# Altium PCB Copy of Copy of PCB1.PcbDoc
Units mm, origin at the board's own origin, x right, y up, seen from the top; angles counter-clockwise.
Board outline 70.25 x 20.25 mm, 2 copper layers (Top Layer, Bottom Layer); 41 components, 28 nets, 155 pads, 30 vias.
Unrouted connection lines stored in the file: 19.
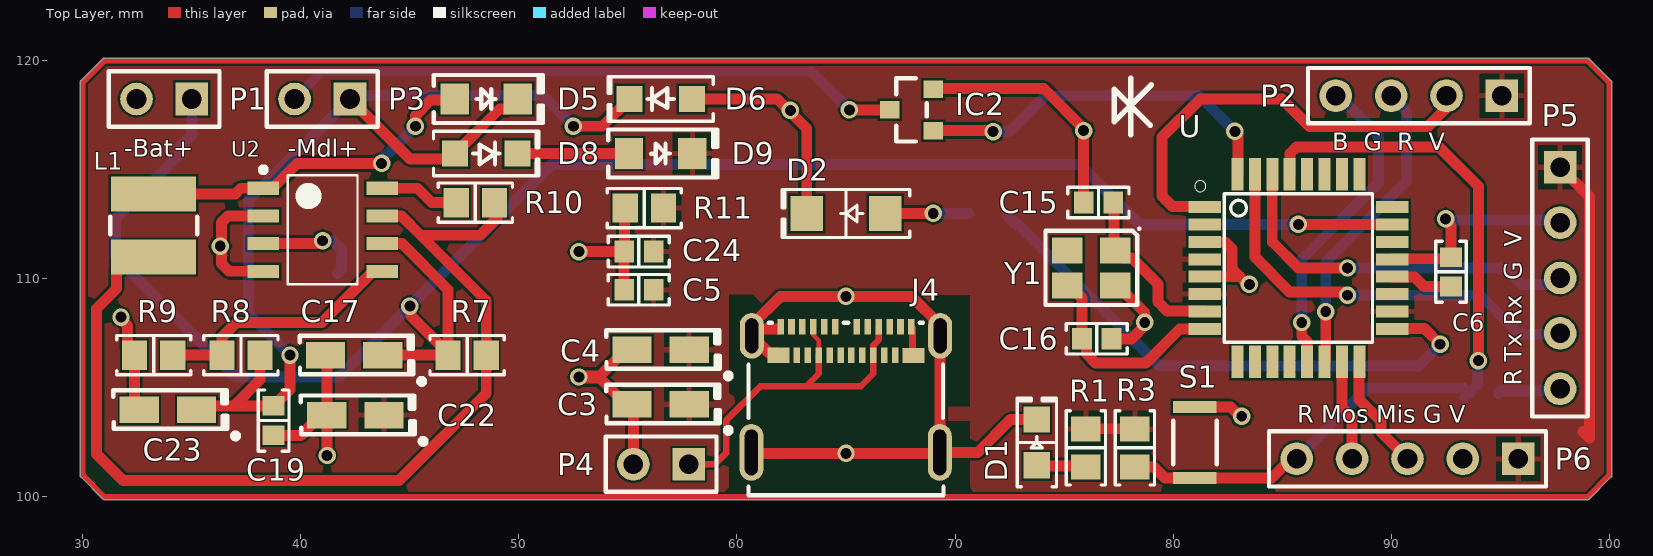
[diagram p0: Top Layer view]
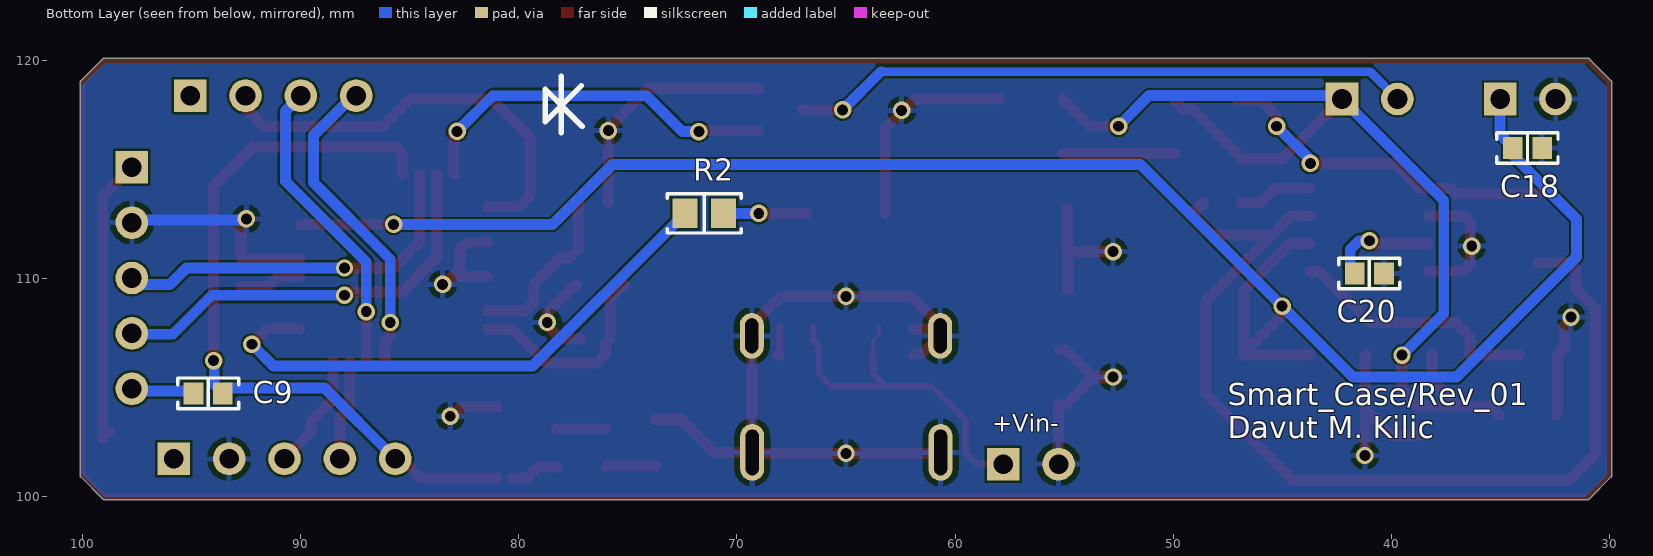
[diagram p1: Bottom Layer view, seen from below]

## Layer stack, top to bottom
Top Solder: solder mask 0.0102, Solder Resist, Dk 3.5
Top Layer: signal copper 0.0356
Dielectric 1: dielectric 0.32, FR-4, Dk 4.8
Bottom Layer: signal copper 0.0356
Bottom Solder: solder mask 0.0102, Solder Resist, Dk 3.5

## Board outline
29.91,100.909 cw(c30,101) 29.873,101 29.873,119 cw(c30,119) 29.91,119.091 29.91,119.09 30.91,120.09 30.909,120.09 cw(c31,120) 31,120.127 99,120.127 cw(c99,120) 99.091,120.09 99.09,120.09 100.09,119.09 100.09,119.091 cw(c100,119) 100.127,119 100.127,101 cw(c100,101) 100.09,100.91 99.09,99.91 99.091,99.91 cw(c99,100) 99,99.873 31,99.873 cw(c31,100) 30.909,99.91 30.91,99.91

## Design rules (kind name [scope] priority, off if disabled: settings)
Clearance [All] p1: gap=0.1 ignorepadtopadclearanceinfootprint=FALSE except(0: Arc-Hole Track-Hole SMDPad-Hole THPad-Hole Via-Hole Fill-Hole Poly-Hole Region-Hole Text-Hole)
MinimumSolderMaskSliver [All] p1: minsoldermaskwidth=0.04
PolygonConnect [All] p1: connectstyle=Relief reliefconductorwidth=0.254 reliefentries=4 polygonreliefangle="90 Angle" airgapwidth=0.254
RoutingVias [All] p1: holewidth=0.711 width=1.27 viastyle="Through Hole" minholewidth=0.4 minwidth=0.8 maxholewidth=0.711 maxwidth=1.27
SilkToSilkClearance [All] p1: silktosilkclearance=0.15
SilkToSolderMaskClearance [IsPad] p1: minsilkscreentomaskgap=0.07 clearancetoexposedcopper=TRUE
SolderMaskExpansion [All] p1: expansion=0.103
Width [All] p1: maxlimit=0.6 minlimit=0.1 preferedwidth=0.5 minimp=50.000000 maximp=50.000000 favimp=50.000000
27 further rules are at their usual default settings.

## Components (designator, comment, footprint, x,y, rotation, side; value= is the part's Value field where it differs from the comment)
C3 "4.7µF" "CAP POL 1206_3216" 56.5,104.25 r180 top
C4 "4.7µF" "CAP POL 1206_3216" 56.5,106.75 r180 top
C5 "0.1µF" "CAP 0603_1608" 55.5,109.5 r0 top
C6 "0.1µF" "CAP 0603_1608" 92.75,110.325 r270 top
C9 "0.1µF" "CAP 0603_1608" 94.25,104.75 r0 bottom
C15 "22pF" "CAP 0603_1608" 76.575,113.5 r180 top
C16 "22pF" "CAP 0603_1608" 76.5,107.25 r0 top
C17 "470µF" "CAP POL 1206_3216" 42.44,106.5 r180 top
C18 "100nF" "CAP 0603_1608" 33.75,116 r0 bottom
C19 "100uF" "CAP 0603_1608" 38.75,103.5 r90 top
C20 "0.1µF" "CAP 0603_1608" 41,110.25 r0 bottom
C22 "100uF" "CAP POL 1206_3216" 42.5,103.75 r180 top
C23 "470µF" "CAP POL 1206_3216" 33.9,104 r180 top
C24 "100nF" "CAP 0603_1608" 55.5,111.25 r0 top
D1 "Red" "LED 0805_2012 RED" 73.75,102.5 r90 top
D2 "White" "LED 1206_3216" 65,113 r180 top
D5 "1N5819" "SMF DO-219AB" 48.5,118.25 r0 top
D6 "1N4007FLTR" SOD123F 56.5,118.25 r180 top
D8 "1N4007FLTR" SOD123F 48.5,115.75 r0 top
D9 "1N5819" "SMF DO-219AB" 56.5,115.75 r0 top
IC2 "DMN2050L-7" "DIODES SOT-23-3" 68,117.75 r180 top
J4 "1054500101" "Molex 1054500101" 65,107.145 r0 top
L1 "100µH" "TDK VLCF4028-2" 33.25,112.45 r270 top
P1 "Header 2" HDR1X2 35,118.25 r180 top
P2 "Header 4" HDR1X4 95.08,118.4 r180 top
P3 "Header 2" HDR1X2 42.25,118.25 r180 top
P4 "Header 2" HDR1X2 57.79,101.5 r180 top
P5 "Header 5" HDR1X5 97.75,115.12 r270 top
P6 "Header 5" HDR1X5 95.83,101.75 r180 top
R1 "1 kOhms" "RES 0805_2012" 76,102.25 r90 top
R2 "1 kOhms" "RES 0805_2012" 71.5,113 r0 bottom
R3 "1 kOhms" "RES 0805_2012" 78.25,102.25 r90 top
R7 "0.27Ohms" "RES 0805_2012" 47.625,106.5 r180 top
R8 "10kOhms" "RES 0805_2012" 37.25,106.5 r0 top
R9 "2.7kOhms" "RES 0805_2012" 33.25,106.5 r0 top
R10 "180 Ohms" "RES 0805_2012" 48,113.5 r0 top
R11 "470Ohms" "RES 0805_2012" 55.75,113.25 r0 top
S1 "EVP-AWED4A" "PANASONIC EVPAW" 81,102.5 r270 top
U "ATMEGA328P-AU" QFP80P900X900X120-32N 85.75,110.5 r0 top
U2 "MC34063A" MC34063A,SOIC127P600X140-8N 41,112.25 r0 top
Y1 "16MHz" "NDK NX3225SA" 76.25,110.5 r180 top

## Footprints (in the part's own frame and the unit in brackets; to place one, negate y for a bottom-side part, rotate by r counter-clockwise, add the part's x,y. Pads: shape width x height; smd on the part's side, far side on the other; paste and mask are expansions set on the pad)
"CAP 0603_1608" [mm] "Chip Capacitor, 2-Leads, Body 1.60x0.80mm, IPC Medium Density"
  rect 0.9x1 smd: 1(-0.675,0) 2(0.675,0)
  silkscreen extent -1.4,-0.7 1.4,0.7, body extent -0.8,-0.41 0.8,0.41, height 0.82
"CAP POL 1206_3216" [mm] "Molded Capacitor, 2-Leads, Body 3.20x1.6mm, IPC Medium Density"
  rect 1.8x1.23 smd: 1(-1.31,0) 2(1.31,0)
  silkscreen extent -3.22,-0.9 2.5,1.32, body extent -1.72,-0.85 1.71,0.85, height 1.7
"DIODES SOT-23-3" [mm] "SOT23, 3-Leads, Body 2.90x2.40mm, Pitch 0.95mm, IPC Medium Density"
  rect 0.9x0.8 smd: 1(-1,0.95) 2(-1,-0.95) 3(1,0)
  silkscreen extent -0.7,-1.45 0.7,1.45, body extent -1.41,-1.45 1.41,1.45, height 1.5
HDR1X2 [mm] "Connector; Header; 2 Position"
  rect 1.5x1.5 hole 0.9: 1(0,0)
  round 1.5 hole 0.9: 2(2.54,0)
  silkscreen extent -1.27,-1.27 3.81,1.27
HDR1X4 [mm] "Connector; Header; 4 Position"
  rect 1.5x1.5 hole 0.9: 1(0,0)
  round 1.5 hole 0.9: 2(2.54,0) 3(5.08,0) 4(7.62,0)
  silkscreen extent -1.27,-1.27 8.89,1.27
HDR1X5 [mm] "Connector; Header; 5 Position"
  rect 1.5x1.5 hole 0.9: 1(0,0)
  round 1.5 hole 0.9: 2(2.54,0) 3(5.08,0) 4(7.62,0) 5(10.16,0)
  silkscreen extent -1.27,-1.27 11.43,1.27
"LED 0805_2012 RED" [mm] "Chip Diode, 2-Leads, Body 2.00x1.25mm, IPC Medium Density"
  rect 1.2x1.2 smd: 1(-1.05,0) 2(1.05,0)
  silkscreen extent -2.03,-0.9 2.03,0.9, body extent -1,-0.62 1,0.63, height 0.9
"LED 1206_3216" [mm] "Chip Diode, 2-Leads, Body 3.13x1.55mm, IPC Medium Density"
  rect 1.5x1.6 smd: 1(-1.8,0) 2(1.8,0)
  silkscreen extent -2.92,-1.1 2.92,1.1, body extent -1.6,-0.8 1.6,0.8, height 0.9
MC34063A,SOIC127P600X140-8N [mm] "1.5 A, Step-Up/Down/  Inverting Switching  RegulatorsSOIC, 8-Leads, Body 4,90x3,90mm, Pitch 1,27mm, IPC Medium Density"
  rect 1.45x0.6 smd: 1(-2.725,1.905) 2(-2.725,0.635) 3(-2.725,-0.635) 4(-2.725,-1.905) 5(2.725,-1.905) 6(2.725,-0.635) 7(2.725,0.635) 8(2.725,1.905)
  silkscreen extent -2.85,-2.5 1.6,2.88, body extent -3,-2.5 3,2.5, height 1.4
"Molex 1054500101" [mm] "USB-C Receptacle Connector 24 Position Surface Mount, 24 Position, Body 8.94x7.90mm"
  rect 0.3x0.7 smd: A1(-3,0.655) A2(-2.5,0.655) A3(-2,0.655) A4(-1.5,0.655) A5(-1,0.655) A6(-0.5,0.655) A7(0.5,0.655) A8(1,0.655) A9(1.5,0.655) A10(2,0.655) A11(2.5,0.655) A12(3,0.655) B2(2.25,-0.645) B3(1.75,-0.645) B4(1.25,-0.645) B5(0.75,-0.645) B6(0.25,-0.645) B7(-0.25,-0.645) B8(-0.75,-0.645) B9(-1.25,-0.645) B10(-1.75,-0.645) B11(-2.25,-0.645)
  rect 1x0.7 smd: B1(3.1,-0.655) B12(-3.1,-0.645)
  oval 1.1x2.6 hole 2.1 slot 0.6 at 0 deg unplated: S(-4.34,-5.105) S(4.3,-5.105)
  oval 1.1x2.1 hole 1.6 slot 0.6 at 0 deg unplated: S(-4.32,0.245) S(4.32,0.245)
  silkscreen extent -4.47,-7.07 4.47,0.83, body extent -4.47,-7.07 4.47,0.83, height 3.21
"NDK NX3225SA" [mm] "Crystal, 4-Leads, Body 2.50x3.20mm, Pitch 2.20mm, IPC Medium Density"
  rect 1.4x1.2 smd: 1(-1.1,-0.8) 2(1.1,-0.8) 3(1.1,0.8) 4(-1.1,0.8)
  silkscreen extent -2.25,-1.85 2.1,1.7, body extent -1.61,-1.26 1.61,1.26, height 0.6
"PANASONIC EVPAW" [mm]
  rect 0.55x2 smd: 1(-1.625,0) 2(1.625,0)
  silkscreen extent -1,-1 1,1, body extent -1.75,-1 1.75,1, height 0.58
QFP80P900X900X120-32N [mm]
  rect 1.5x0.55 smd: 1(-4.3,2.8) 2(-4.3,2) 3(-4.3,1.2) 4(-4.3,0.4) 5(-4.3,-0.4) 6(-4.3,-1.2) 7(-4.3,-2) 8(-4.3,-2.8) 17(4.3,-2.8) 18(4.3,-2) 19(4.3,-1.2) 20(4.3,-0.4) 21(4.3,0.4) 22(4.3,1.2) 23(4.3,2) 24(4.3,2.8)
  rect 0.55x1.5 smd: 9(-2.8,-4.3) 10(-2,-4.3) 11(-1.2,-4.3) 12(-0.4,-4.3) 13(0.4,-4.3) 14(1.2,-4.3) 15(2,-4.3) 16(2.8,-4.3) 25(2.8,4.3) 26(2,4.3) 27(1.2,4.3) 28(0.4,4.3) 29(-0.4,4.3) 30(-1.2,4.3) 31(-2,4.3) 32(-2.8,4.3)
  silkscreen extent -4.75,-3.4 3.4,4
"RES 0805_2012" [mm] "Chip Resistor, 2-Leads, Body 2.00x1.25mm, IPC Medium Density"
  rect 1.15x1.35 smd: 1(-0.875,0) 2(0.875,0)
  silkscreen extent -1.7,-0.9 1.7,0.9, body extent -1,-0.62 1,0.63, height 0.6
"SMF DO-219AB" [mm] "Molded Diode, 2-Leads, Body 3.90x1.90mm, IPC Medium Density"
  rect 1.3x1.4 smd: 1(-1.45,0) 2(1.45,0)
  silkscreen extent -2.4,-1.1 2.59,1.1, body extent -1.5,-0.9 1.5,0.9, height 1.18
SOD123F [mm] "SODFL, 2-Leads, Body 1.60x3.50mm, IPC Medium Density"
  rect 1.2x1.2 smd: 1(-1.43,0) 2(1.43,0)
  silkscreen extent -2.41,-1.02 2.41,1.02, body extent -1.75,-0.8 1.75,0.8, height 1.1
"TDK VLCF4028-2" [mm] "Precision Wire Wound Inductor, 2-Leads, Body 4.00x4.00mm, IPC Medium Density"
  rect 1.6x3.9 smd: 1(-1.45,0) 2(1.45,0)
  silkscreen extent -0.4,-2 0.4,2, body extent -2.05,-2 2.05,2, height 2.81

## Part data
C3 C4: library part T55A475M010C0500, "CAP TANT POLY 4.7UF 10V 1206", Device Package="1206 (3216 Metric)", ESR (Equivalent Series Resistance)="500mOhm @ 100kHz", Manufacturer="Vishay Sprague", Manufacturer Size Code=A, Operating Temperature="-55°C ~ 105°C", Supplier Part Number 1=718-2008-1-ND, Tolerance=±20%, Voltage - Rated=10V, Capacitance=4.7µF, ComponentLink1Description=Datasheet, ComponentLink1URL=http://www.vishay.com/docs/40174/t55.pdf, ComponentLink2Description="DigiKey Link", ComponentLink2URL=http://digikey.com/product-detail/en/vishay-sprague/T55A475M010C0500/718-2008-1-ND/4989604, Features="General Purpose", Height - Seated (Max)="0.071\" (1.80mm)", LastUpdated="2.09.2020 01:16:25", Lifecycle Status=Active, Minimum Order=1, Mounting Type="Surface Mount", Package / Case="1206 (3216 Metric)", Packaging=TapeAndReel, PartId=67, Part Number=T55A475M010C0500, Part Status=Active, Price=0.32, Series="vPolyTan™ T55", Size / Dimension="0.126\" L x 0.063\" W (3.20mm x 1.60mm)", Supplier 1=DigiKey, Type=Molded
C5 C9 C20: library part C0603C104K5RAC7411, "CAP CER 0.1UF 50V X7R 0603", Device Package="0603 (1608 Metric)", Manufacturer=KEMET, Operating Temperature="-55°C ~ 125°C", Supplier Part Number 1=399-7374-2-ND, Temperature Coefficient=X7R, Tolerance=±10%, Voltage - Rated=50V, Applications="Bypass, Decoupling", Capacitance=0.1µF, ComponentLink1Description=Datasheet, ComponentLink1URL=https://api.kemet.com/component-edge/download/datasheet/C0603C104K5RAC7411.pdf, ComponentLink2Description="DigiKey Link", ComponentLink2URL=http://digikey.com/product-detail/en/kemet/C0603C104K5RAC7411/399-7374-2-ND/3317013, LastUpdated="2.09.2020 01:03:36", Lifecycle Status=Active, Minimum Order=15000, Mounting Type="Surface Mount, MLCC", Package / Case="0603 (1608 Metric)", Packaging=TapeAndReel, PartId=2233, Part Number=C0603C104K5RAC7411, Part Status=Active, Price=0.02, Series="SMD Comm X7R", Size / Dimension="0.063\" L x 0.031\" W (1.60mm x 0.80mm)", Supplier 1=DigiKey, Thickness (Max)="0.035\" (0.90mm)"
C6: library part CS0603KRX7R7BB104, "CAP CER 0.1UF 16V X7R 0603", Device Package="0603 (1608 Metric)", Manufacturer=Yageo, Operating Temperature="-55°C ~ 125°C", Supplier Part Number 1=311-3560-1-ND, Temperature Coefficient=X7R, Tolerance=±10%, Voltage - Rated=16V, Applications="Boardflex Sensitive", Capacitance=0.1µF, ComponentLink1Description=Datasheet, ComponentLink1URL=http://www.yageo.com/NewPortal/yageodocoutput?fileName=/pdf/MLCC/UPY-ST_NPOX7R_16V-to-3KV_5.pdf, ComponentLink2Description="DigiKey Link", ComponentLink2URL=http://digikey.com/product-detail/en/yageo/CS0603KRX7R7BB104/311-3560-1-ND/7648487, Features="Soft Termination", LastUpdated="2.09.2020 01:03:36", Lifecycle Status=Active, Minimum Order=1, Mounting Type="Surface Mount, MLCC", Package / Case="0603 (1608 Metric)", Packaging=TapeAndReel, PartId=2286, Part Number=CS0603KRX7R7BB104, Part Status=Active, Price=0.02, Series=CS, Size / Dimension="0.063\" L x 0.031\" W (1.60mm x 0.80mm)", Supplier 1=DigiKey, Thickness (Max)="0.037\" (0.95mm)"
C15 C16 C18 C19 C24: library part C0603C104K5RAC7411, "CAP CER 0.1UF 50V X7R 0603", Capacitance=0.1µF, Device Package="0603 (1608 Metric)", Manufacturer=KEMET, Operating Temperature="-55°C ~ 125°C", Supplier Part Number 1=399-7374-2-ND, Temperature Coefficient=X7R, Tolerance=±10%, Voltage - Rated=50V, Applications="Bypass, Decoupling", ComponentLink1Description=Datasheet, ComponentLink1URL=https://api.kemet.com/component-edge/download/datasheet/C0603C104K5RAC7411.pdf, ComponentLink2Description="DigiKey Link", ComponentLink2URL=http://digikey.com/product-detail/en/kemet/C0603C104K5RAC7411/399-7374-2-ND/3317013, LastUpdated="2.09.2020 01:03:36", Lifecycle Status=Active, Minimum Order=15000, Mounting Type="Surface Mount, MLCC", Package / Case="0603 (1608 Metric)", Packaging=TapeAndReel, PartId=2233, Part Number=C0603C104K5RAC7411, Part Status=Active, Price=0.02, Series="SMD Comm X7R", Size / Dimension="0.063\" L x 0.031\" W (1.60mm x 0.80mm)", Supplier 1=DigiKey, Thickness (Max)="0.035\" (0.90mm)"
C17 C22 C23: library part T55A475M010C0500, "CAP TANT POLY 4.7UF 10V 1206", Capacitance=4.7µF, Device Package="1206 (3216 Metric)", ESR (Equivalent Series Resistance)="500mOhm @ 100kHz", Manufacturer="Vishay Sprague", Manufacturer Size Code=A, Operating Temperature="-55°C ~ 105°C", Supplier Part Number 1=718-2008-1-ND, Tolerance=±20%, Voltage - Rated=10V, ComponentLink1Description=Datasheet, ComponentLink1URL=http://www.vishay.com/docs/40174/t55.pdf, ComponentLink2Description="DigiKey Link", ComponentLink2URL=http://digikey.com/product-detail/en/vishay-sprague/T55A475M010C0500/718-2008-1-ND/4989604, Features="General Purpose", Height - Seated (Max)="0.071\" (1.80mm)", LastUpdated="2.09.2020 01:16:25", Lifecycle Status=Active, Minimum Order=1, Mounting Type="Surface Mount", Package / Case="1206 (3216 Metric)", Packaging=TapeAndReel, PartId=67, Part Number=T55A475M010C0500, Part Status=Active, Price=0.32, Series="vPolyTan™ T55", Size / Dimension="0.126\" L x 0.063\" W (3.20mm x 1.60mm)", Supplier 1=DigiKey, Type=Molded
D1: library part EAST2012RA1, "LED RED CLEAR 2SMD", Current - Test=20mA, Device Package="0805 (2012 Metric)", Lens Color=Colorless, Manufacturer="Everlight Electronics Co Ltd", Millicandela Rating=79mcd, Supplier Device Package=2-SMD, Supplier Part Number 1=1080-EAST2012RA1CT-ND, Voltage - Forward (Vf) (Typ)=2V, Color=Red, ComponentLink1Description=Datasheet, ComponentLink1URL=https://everlightamericas.com/index.php?controller=attachment&id_attachment=2888, ComponentLink2Description="DigiKey Link", ComponentLink2URL=http://digikey.com/product-detail/en/everlight-electronics-co-ltd/EAST2012RA1/1080-EAST2012RA1CT-ND/11201058, Configuration=Standard, Height (Max)=1.00mm, LastUpdated="2.09.2020 01:21:00", Lens Size="1.40mm x 1.25mm", Lens Style="Rectangle with Flat Top", Lens Transparency=Clear, Lifecycle Status=Active, Minimum Order=1, Mounting Type="Surface Mount", Package / Case="0805 (2012 Metric)", Packaging=TapeAndReel, PartId=943, Part Number=EAST2012RA1, Part Status=Active, Price=0.03, Series=-, Size / Dimension="2.00mm L x 1.25mm W", Supplier 1=DigiKey, Viewing Angle=120°, Wavelength - Dominant=626nm, Wavelength - Peak=632nm
D2: library part LTW-C230DS, "LED WHITE 1206 SMD", Current - Test=20mA, Device Package="1206 (3216 Metric)", Lens Color=Yellow, Manufacturer="Lite-On Inc.", Millicandela Rating=315mcd, Supplier Device Package=1206, Supplier Part Number 1=160-2221-1-ND, Voltage - Forward (Vf) (Typ)=3.2V, Color=White, ComponentLink1Description=Datasheet, ComponentLink1URL=http://optoelectronics.liteon.com/upload/download/DS22-2007-0232/LTW-C230DS.pdf, ComponentLink2Description="DigiKey Link", ComponentLink2URL=http://digikey.com/product-detail/en/lite-on-inc/LTW-C230DS/160-2221-1-ND/7597462, Configuration=Independent, Height (Max)=1.10mm, LastUpdated="2.09.2020 01:22:59", Lens Size="1.50mm x 1.60mm", Lens Style="Rectangle with Flat Top", Lifecycle Status=Active, Minimum Order=1, Mounting Type="Surface Mount", Package / Case="1206 (3216 Metric)", Packaging=TapeAndReel, PartId=933, Part Number=LTW-C230DS, Part Status=Active, Price=0.13, Series=-, Size / Dimension="3.20mm L x 1.60mm W", Supplier 1=DigiKey, Viewing Angle=130°
D5 D9: library part SMF45A-E3-08, "TVS DIODE 45V 72.7V DO219AB", Capacitance @ Frequency="162pF @ 1MHz", Current - Peak Pulse (10/1000µs)=2.8A, Manufacturer="Vishay Semiconductor Diodes Division", Operating Temperature="-65°C ~ 175°C (TJ)", Package / Case=DO-219AB, Power - Peak Pulse=200W, Power Line Protection=No, Supplier Device Package=SMF, Supplier Part Number 1=SMF45A-E3-08GICT-ND, Voltage - Breakdown (Min)=50V, Voltage - Clamping (Max) @ Ipp=72.7V, Voltage - Reverse Standoff (Typ)=45V, Applications="General Purpose", ComponentLink1Description=Datasheet, ComponentLink1URL=http://www.vishay.com/docs/85881/smf5v0atosmf58a.pdf, ComponentLink2Description="DigiKey Link", ComponentLink2URL=http://digikey.com/product-detail/en/vishay-semiconductor-diodes-division/SMF45A-E3-08/SMF45A-E3-08GICT-ND/5639183, LastUpdated="2.09.2020 01:27:45", Lifecycle Status=Active, Minimum Order=1, Mounting Type="Surface Mount", Packaging=TapeAndReel, PartId=5508, Part Number=SMF45A-E3-08, Part Status=Active, Price=0.10, Series=-, Supplier 1=DigiKey, Type=Zener, Unidirectional Channels=1
D6 D8: "STANDARD RECTIFIER 1000V SOD-123", Capacitance @ Vr, F="15pF @ 4V, 1MHz", Current - Average Rectified (Io)=1A, Current - Reverse Leakage @ Vr="5µA @ 1000V", Manufacturer="SMC Diode Solutions", Package / Case=SOD-123F, Supplier Device Package=SOD-123FL, Supplier Part Number 1=1655-1N4007FLCT-ND, Voltage - DC Reverse (Vr) (Max)=1000V, Voltage - Forward (Vf) (Max) @ If="1.1V @ 1A", ComponentLink1Description=Datasheet, ComponentLink1URL=http://www.smc-diodes.com/propdf/1N4001FL-1N4007FL%20N1646%20REV.A.pdf, ComponentLink2Description="DigiKey Link", ComponentLink2URL=http://digikey.com/product-detail/en/smc-diode-solutions/1N4007FLTR/1655-1N4007FLCT-ND/11657827, Diode Type=Standard, LastUpdated="30.08.2020 20:59:55", Lifecycle Status=Active, Minimum Order=1, Mounting Type="Surface Mount", Packaging=TapeAndReel, PartId=3314, Part Number=1N4007FLTR, Price=0.01, Speed="Standard Recovery >500ns, > 200mA (Io)", Supplier 1=DigiKey
IC2: "MOSFET N-CH 20V 5.9A SOT23-3", Current - Continuous Drain (Id) @ 25°C="5.9A (Ta)", Drain to Source Voltage (Vdss)=20V, Drive Voltage (Max Rds On,  Min Rds On)="2V, 4.5V", Input Capacitance (Ciss) (Max) @ Vds="532pF @ 10V", Manufacturer="Diodes Incorporated", Operating Temperature="-55°C ~ 150°C (TJ)", Package / Case="TO-236-3, SC-59, SOT-23-3", Power Dissipation (Max)="1.4W (Ta)", Supplier Device Package=SOT-23-3, Supplier Part Number 1=DMN2050LDICT-ND, ComponentLink1Description=Datasheet, ComponentLink1URL=https://www.diodes.com/assets/Datasheets/ds31502.pdf, ComponentLink2Description="DigiKey Link", ComponentLink2URL=http://digikey.com/product-detail/en/diodes-incorporated/DMN2050L-7/DMN2050LDICT-ND/1964751, FET Type=N-Channel, Gate Charge (Qg) (Max) @ Vgs="6.7nC @ 4.5V", LastUpdated="2.09.2020 01:25:02", Lifecycle Status=Active, Minimum Order=1, Mounting Type="Surface Mount", Packaging=TapeAndReel, Part Number=DMN2050L-7, Part Status=Active, Price=0.12, Rds On (Max) @ Id, Vgs="29mOhm @ 5A, 4.5V", Series=-, Supplier 1=DigiKey, Technology="MOSFET (Metal Oxide)", Vgs (Max)=±12V, Vgs(th) (Max) @ Id="1.4V @ 250µA"
J4: "CONN RCP USB3.1 TYPEC 24P SMD RA", Current Rating (Amps)="0.25A, 1A, 5A", Manufacturer=Molex, Operating Temperature="-30°C ~ 85°C", Supplier Part Number 1=WM12856CT-ND, Voltage - Rated=30VAC/DC, ComponentLink1Description=Datasheet, ComponentLink1URL=https://www.molex.com/pdm_docs/ps/PS-105448-001.pdf, ComponentLink2Description="DigiKey Link", ComponentLink2URL=http://digikey.com/product-detail/en/molex/1054500101/WM12856CT-ND/5843891, Connector Type="USB - C (Type - C)", Gender=Receptacle, LastUpdated="6.06.2020 02:14:04", Lifecycle Status=Active, Mating Cycles=10000, Minimum Order=1, Mounting Feature=Horizontal, Mounting Type="Surface Mount, Right Angle; Through Hole", Number of Contacts=24, Number of Ports=1, Packaging=TapeAndReel, Part Number=1054500101, Part Status=Active, Price=1.22, Series=105445, Shielding=Shielded, Specifications="USB 3.1 (USB 3.1 Gen 2, Superspeed+)", Supplier 1=DigiKey, Termination=Solder
L1: library part VLCF5028T-101MR33-2, "FIXED IND 100UH 330MA 670 MOHM", Current - Saturation=330mA, DC Resistance (DCR)="670mOhm Max", Device Package=Nonstandard, Inductance Frequency - Test=100kHz, Manufacturer="TDK Corporation", Operating Temperature="-40°C ~ 105°C", Supplier Part Number 1=445-6555-1-ND, Tolerance=±20%, ComponentLink1Description=Datasheet, ComponentLink1URL=https://product.tdk.com/info/en/catalog/datasheets/inductor_commercial_power_vlcf5028-2_en.pdf?ref_disty=digikey, ComponentLink2Description="DigiKey Link", ComponentLink2URL=http://digikey.com/product-detail/en/tdk-corporation/VLCF5028T-101MR33-2/445-6555-1-ND/2465861, Current Rating (Amps)=330mA, Height - Seated (Max)="0.110\" (2.80mm)", Inductance=100µH, LastUpdated="2.09.2020 01:22:16", Lifecycle Status=Active, Material - Core=Ferrite, Minimum Order=1, Mounting Type="Surface Mount", Package / Case=Nonstandard, Packaging=TapeAndReel, PartId=186, Part Number=VLCF5028T-101MR33-2, Part Status=Active, Price=0.63, Series=VLCF, Shielding=Shielded, Size / Dimension="0.197\" L x 0.197\" W (5.00mm x 5.00mm)", Supplier 1=DigiKey, Type=Wirewound
P1 P3 P4: "Header, 2-Pin", LatestRevisionDate=17-Jul-2002, LatestRevisionNote="Re-released for DXP Platform.", Publisher="Altium Limited"
P2: "Header, 4-Pin", LatestRevisionDate=17-Jul-2002, LatestRevisionNote="Re-released for DXP Platform.", Publisher="Altium Limited"
P5 P6: "Header, 5-Pin", LatestRevisionDate=17-Jul-2002, LatestRevisionNote="Re-released for DXP Platform.", Publisher="Altium Limited"
R1 R2 R3: library part RNCP0805FTD1K00, "RES 1K OHM 1% 1/4W 0805", Device Package="0805 (2012 Metric)", Manufacturer="Stackpole Electronics Inc", Operating Temperature="-55°C ~ 155°C", Power (Watts)="0.25W, 1/4W", Supplier Device Package=0805, Supplier Part Number 1=RNCP0805FTD1K00CT-ND, Temperature Coefficient=±100ppm/°C, Tolerance=±1%, ComponentLink1Description=Datasheet, ComponentLink1URL=https://www.seielect.com/catalog/sei-rncp.pdf, ComponentLink2Description="DigiKey Link", ComponentLink2URL=http://digikey.com/product-detail/en/stackpole-electronics-inc/RNCP0805FTD1K00/RNCP0805FTD1K00CT-ND/2240568, Composition="Thin Film", Features="Anti-Sulfur, Moisture Resistant", Height - Seated (Max)="0.024\" (0.60mm)", LastUpdated="2.09.2020 01:15:23", Lifecycle Status=Active, Minimum Order=1, Number of Terminations=2, Package / Case="0805 (2012 Metric)", Packaging=TapeAndReel, PartId=28023, Part Number=RNCP0805FTD1K00, Part Status=Active, Price=0.01, Resistance="1 kOhms", Series=RNCP, Size / Dimension="0.079\" L x 0.049\" W (2.00mm x 1.25mm)", Supplier 1=DigiKey
R7 R8 R9 R10 R11: library part RNCP0805FTD1K00, "RES 1K OHM 1% 1/4W 0805", Device Package="0805 (2012 Metric)", Manufacturer="Stackpole Electronics Inc", Operating Temperature="-55°C ~ 155°C", Power (Watts)="0.25W, 1/4W", Resistance="1 kOhms", Supplier Device Package=0805, Supplier Part Number 1=RNCP0805FTD1K00CT-ND, Temperature Coefficient=±100ppm/°C, Tolerance=±1%, ComponentLink1Description=Datasheet, ComponentLink1URL=https://www.seielect.com/catalog/sei-rncp.pdf, ComponentLink2Description="DigiKey Link", ComponentLink2URL=http://digikey.com/product-detail/en/stackpole-electronics-inc/RNCP0805FTD1K00/RNCP0805FTD1K00CT-ND/2240568, Composition="Thin Film", Features="Anti-Sulfur, Moisture Resistant", Height - Seated (Max)="0.024\" (0.60mm)", LastUpdated="2.09.2020 01:15:23", Lifecycle Status=Active, Minimum Order=1, Number of Terminations=2, Package / Case="0805 (2012 Metric)", Packaging=TapeAndReel, PartId=28023, Part Number=RNCP0805FTD1K00, Part Status=Active, Price=0.01, Series=RNCP, Size / Dimension="0.079\" L x 0.049\" W (2.00mm x 1.25mm)", Supplier 1=DigiKey
S1: "3.0MM X 2.0MM / 3.3N / 0.15MM ST", Contact Rating @ Voltage="0.02A @ 15VDC", Manufacturer="Panasonic Electronic Components", Operating Force=330gf, Operating Temperature="-40°C ~ 85°C", Supplier Part Number 1=P123440CT-ND, Actuator Height off PCB, Vertical=0.60mm, Actuator Orientation="Top Actuated", Actuator Type=Standard, Circuit=SPST-NO, ComponentLink1Description=Datasheet, ComponentLink1URL=https://industrial.panasonic.com/ac/cdn/e/control/switch/light-touch/catalog/sw_lt_eng_3020s.pdf, ComponentLink2Description="DigiKey Link", ComponentLink2URL=http://digikey.com/product-detail/en/panasonic-electronic-components/EVP-AWED4A/P123440CT-ND/8568287, Illumination=Non-Illuminated, Ingress Protection="IP67 - Dust Tight, Waterproof", LastUpdated="2.09.2020 01:27:07", Lifecycle Status=Active, Minimum Order=1, Mounting Type="Surface Mount", Outline="3.00mm x 2.00mm", Packaging=TapeAndReel, Part Number=EVP-AWED4A, Part Status=Active, Price=0.14, Series=EVPAW, Supplier 1=DigiKey, Switch Function=Off-Mom, Termination Style="SMD (SMT) Tab"
U: "AVR AVR® ATmega Microcontroller IC 8-Bit 20MHz 32KB _16K x 16_ FLASH 32-TQFP _7x7_", Package="TQFP-32 Microchip", Availability=Unavailable, MF=Microchip, MP=ATMEGA328P-AU, Price=None, SnapEDA_Link=https://www.snapeda.com/parts/ATMEGA328P-AU/Microchip/view-part/44280/?ref=snap
U2: "1.5 A, Step-Up/Down/ / Inverting Switching / Regulators"
Y1: library part NX3225SA-16.000M-STD-CRS-2, "CRYSTAL 16.0000MHZ 8PF SMD", ESR (Equivalent Series Resistance)="120 Ohms", Frequency Stability=±50ppm, Frequency Tolerance=±15ppm, Load Capacitance=8pF, Manufacturer="NDK America, Inc.", Operating Mode=Fundamental, Operating Temperature="-40°C ~ 125°C", Package / Case="4-SMD, No Lead", Ratings=AEC-Q200, Supplier Part Number 1=644-1129-1-ND, ComponentLink1Description=Datasheet, ComponentLink1URL=http://www.ndk.com/images/products/catalog/c_NX3225SA-STD-CRS-2_e.pdf, ComponentLink2Description="DigiKey Link", ComponentLink2URL=http://digikey.com/product-detail/en/ndk-america-inc/NX3225SA-16.000M-STD-CRS-2/644-1129-1-ND/1788484, Frequency=16MHz, Height - Seated (Max)="0.024\" (0.60mm)", LastUpdated="2.09.2020 01:21:59", Lifecycle Status=Active, Minimum Order=1, Mounting Type="Surface Mount", Packaging=TapeAndReel, PartId=598, Part Number=NX3225SA-16.000M-STD-CRS-2, Part Status=Active, Price=0.54, Series=NX3225SA, Size / Dimension="0.126\" L x 0.098\" W (3.20mm x 2.50mm)", Supplier 1=DigiKey, Type="MHz Crystal"

## Via types
v1: diameter 0.8, hole 0.5, Top Layer to Bottom Layer, 30 vias

## Nets (pads, with @x,y where several pads share a name; then routed paths per layer and width w, separated by ;. In a path a pad name is that pad's centre, name@x,y a point inside that pad or via, vN(x,y) a via of type N, cw(c..) or ccw(c..) an arc to the next point about the centre after c; other vN are vias at no path point)
Bat+: C17.1 C18.2 P1.1 R7.2 U2.6 U.23 | length 87.5
  Top Layer w0.5: U2.6 44.635,111.615 46.75,109.5 R7.2@46.75,106.6 ; C17.1 R7.2 R7.2@46.75,106.6 ; v1(45,108.75) 45.057,108.693 45.057,108.293 R7.2@46.75,106.6 ; v1(85.75,112.5) U.23
  Bottom Layer w0.5: P1.1 35,116.625 34.425,116.05 C18.2 34.425,115.675 31.5,112.75 31.5,111 37,105.5 41.75,105.5 v1(45,108.75) 51.5,115.25 75.709,115.25 78.459,112.5 v1(85.75,112.5)
Bat_sw: IC2.1 U.32 | length 17.2
  Top Layer w0.5: IC2.1 71.7,116.8 v1(71.75,116.75) ; v1(82.836,116.765) 82.971,116.629 82.971,114.821 U.32
  Bottom Layer w0.5: v1(71.75,116.75) 72.5,116.75 74.15,118.4 81.2,118.4 v1(82.836,116.765)
DTR: C9.2 P5.5 | length 3.2
  Bottom Layer w0.5: C9.2 95.03,104.855 97.645,104.855 P5.5 P5.5@97.559,105.151
GND: C3.2 C4.2 C5.1 C6.1 C15.2 C16.2 C17.2 C18.1 C19.1 C20.1 C22.2 C23.2 C24.1 D1.2 D2.2 D6.1 IC2.2 J4.A1 J4.A12 J4.B1 J4.B12 J4.S P1.2 P4.2 P5.2 P6.2 R9.1 R11.1 S1.1 U2.2 U2.4 U.3 U.5 U.21 Y1.4 | length 110.1
  Top Layer w0.2: J4.A1@61.9,107.7 J4.A1
  Top Layer w0.3: J4.A12 68.05,107.75 J4.B1@68.05,106.54
  Top Layer w0.5: v1(31.75,108.25) 31.75,108.169 32.05,107.869 32.05,106.825 R9.1 32.375,103.815 C23.2@32.44,103.75 ; U2.4 38.27,110.35 36.7,110.35 36.357,110.693 36.357,111.443 v1(36.3,111.5) 36.357,111.557 36.357,112.582 36.66,112.885 U2.2 ; C19.1 40,102.825 40.54,103.365 40.54,103.385 40.905,103.75 C22.2 ; C17.2 41.19,106.44 C22.2 ; v1(41.2,101.9) 41.2,103.74 C22.2 ; v1(52.75,111.25) C24.1 ; C5.1 C24.1 ; R11.1 54.85,113.225 54.85,111.275 C24.1 ; C4.2 54.905,106.75 53.712,105.557 52.807,105.557 v1(52.75,105.5) 52.807,105.443 53.712,105.443 54.905,104.25 C3.2 55.25,104.19 P4.2 ; D6.1 61.844,118.25 63.2,116.894 D2.2 ; J4.S@60.66,102.04 60.7,102 v1(65,102) 69.26,102 J4.S@69.3,102.04 ; J4.B12 61.8,106.6 61.47,106.6 61.018,107.052 60.68,107.052 60.68,107.39 J4.S@60.68,107.423 ; J4.A1@61.9,107.7 60.957,107.7 J4.S@60.68,107.423 ; J4.B1@68.05,106.54 J4.B1 ; IC2.2 69.025,118.725 74.071,118.725 75.9,116.896 v1(75.9,116.8) C15.2 ; D1.2 72.55,103.55 71.04,102.04 J4.S@69.3,102.04 ; C16.2 78.1,107.25 78.75,107.9 78.699,107.951 v1(78.699,108.003) 78.699,108.451 77.45,109.7 Y1.4 ; S1.1 82.645,104.125 83.069,103.701 v1(83.15,103.701) ; U.5 83.069,110.1 ; U.3 81.471,111.679 82.409,111.679 82.704,111.384 82.704,110.465 83.069,110.1 ; v1(83.5,109.75) 83.419,109.75 83.069,110.1 ; U.21 90.071,110.921 92.671,110.921 C6.1 92.75,112.419 92.5,112.669 v1(92.5,112.75) ; J4.S@60.68,107.423 60.68,107.89 61.99,109.2 v1(65,109.2) 68.01,109.2 69.32,107.89 69.32,107.39 69.31,107.38 69.31,102.05 J4.S@69.3,102.04
  Bottom Layer w0.5: P1.2@32.46,117.979 P1.2 ; J4.S@60.565,107.505 J4.S@60.68,107.39 ; J4.S@60.66,102.04 J4.S@60.7,102 ; v1(92.5,112.75) 92.557,112.693 97.637,112.693 P5.2
  other v1: 62.45,117.725
MISO: P6.3 U.16 | length 5.4
  Top Layer w0.5: U.16 88.529,106.179 88.529,104.475 89.531,103.473 89.531,102.969 P6.3
Modul+: C19.2 C23.1 D5.2 D6.2 D8.1 P3.1 R8.2 | length 47.8
  Top Layer w0.5: C23.1@35.06,103.75 35.485,104.175 36.925,104.175 ; R8.2 38.125,105.375 36.925,104.175 ; v1(39.5,106.5) 39.5,104.925 39,104.425 39,104.375 38.8,104.175 C19.2 36.925,104.175 ; P3.1 45,115.5 46.82,115.5 D8.1 49.12,117.8 49.55,117.8 49.95,118.2 D5.2 ; v1(52.5,117) 53.82,117 D6.2
  Bottom Layer w0.5: v1(39.5,106.5) 37.588,108.412 37.588,113.588 P3.1 42.404,118.404 51.096,118.404 v1(52.5,117)
Modul-: IC2.3 P3.2 | length 28.5
  Top Layer w0.5: v1(65.154,117.75) IC2.3
  Bottom Layer w0.4: P3.2 40.96,119.5 63.404,119.5
  Bottom Layer w0.5: 63.404,119.5 v1(65.154,117.75)
MOSI: P6.4 U.15 | length 4.6
  Top Layer w0.5: U.15 87.75,104.101 88.21,103.641 P6.4
NetC6_2: C6.2 U.20 | length 2.9
  Top Layer w0.5: U.20 90.071,110.079 91.071,110.079 91.5,109.65 C6.2
NetC15_1: C15.1 U.7 Y1.1 | length 8
  Top Layer w0.5: C15.1 77.3,113.45 77.3,111.35 Y1.1 77.7,110.95 78.113,110.95 79.302,109.761 79.302,108.948 79.729,108.521 U.7@81.45,108.521
NetC16_1: C16.1 U.8 Y1.3 | length 9.5
  Top Layer w0.5: Y1.3 75.25,109.7 75.825,109.125 C16.1@75.825,107.5 ; C16.1 76.025,107.05 76.025,106.575 76.45,106.15 78.755,106.15 80.305,107.7 U.8
NetC20_2: C20.2 U2.3 | length 5
  Top Layer w0.5: U2.3 40.784,111.615 40.919,111.75 v1(41,111.75)
  Bottom Layer w0.5: v1(41,111.75) 41.479,111.75 41.875,111.354 41.875,110.45 C20.2
NetD1_1: D1.1 R1.1 | length 2.3
  Top Layer w0.5: D1.1 73.787,101.413 75.962,101.413 R1.1
NetD2_1: D2.1 R2.1 | length 3.8
  Top Layer w0.5: D2.1 v1(69,113)
  Bottom Layer w0.5: v1(69,113) R2.1
NetD5_1: D5.1 L1.1 U2.1 | length 16
  Top Layer w0.5: L1.1 36.99,113.9 37.245,114.155 U2.1 38.7,114.155 39.845,115.3 v1(43.7,115.3) ; v1(45.25,117) 45.25,117.5 45.95,118.2 47.05,118.2 D5.1
  Bottom Layer w0.5: v1(43.7,115.3) 43.7,115.45 v1(45.25,117)
NetD8_2: D8.2 D9.1 | length 5.1
  Top Layer w0.5: D8.2 D9.1
NetL1_2: L1.2 R7.1 R10.2 U2.7 | length 46.1
  Top Layer w0.5: L1.2@33.25,110.75 31.85,110.75 31.55,110.45 31.55,109.55 30.631,108.631 30.631,101.969 31.85,100.75 44.5,100.75 48.5,104.75 R7.1 48.5,109 45.5,112 ; U2.7 44.615,112.885 45.5,112 ; R10.2@48.625,113.4 48.625,113.5 49,113.125 49,112.793 48.207,112 45.5,112
NetR8_1: R8.1 R9.2 U2.5 | length 11.7
  Top Layer w0.5: R9.2 R8.1 36.375,107.332 37.043,108 40.955,108 43.3,110.345 U2.5
NetR10_1: R10.1 U2.8 | length 3.4
  Top Layer w0.5: U2.8 45.345,114.155 46,113.5 R10.1@46.875,113.5
RESET: C9.1 P6.5 R3.1 S1.2 U.29 | length 37
  Top Layer w0.5: R3.1 79.125,101.375 79.625,100.875 S1.2@80.275,100.875 ; S1.2 84.524,100.875 85.399,101.75 P6.5 ; U.29 85.371,114.821 85.371,115.759 85.666,116.054 92.196,116.054 94,114.25 v1(94,106.25)
  Bottom Layer w0.5: P6.5 88.92,105 93.325,105 C9.1 ; C9.1@93.375,104.55 C9.1 ; v1(94,106.25) 93.971,106.221 93.971,105.146 C9.1
Rgb_b: P2.4 U.13 | length 14.6
  Top Layer w0.5: v1(85.9,108) 85.9,107.388 86.15,107.138 U.13
  Bottom Layer w0.5: v1(85.9,108) 85.9,110.9 89.42,114.42 89.42,116.58 87.8,118.2 P2.4@87.42,118.2
Rgb_g: P2.3 U.14 | length 14.1
  Top Layer w0.5: U.14@86.971,106.179 U.14 87,106.25 v1(87,108.5)
  Bottom Layer w0.5: v1(87,108.5) 87,110.778 90.7,114.478 90.7,117.7 90.12,118.28 P2.3@89.88,118.28
Rgb_r: P2.2 U.1 | length 19.8
  Top Layer w0.5: U.1 81.425,113.325 79.968,113.325 79.5,113.793 79.5,116.5 81.25,118.25 85,118.25 86.254,116.996 91.696,116.996 92.5,117.8 P2.2@92.5,118.2
Rx: P5.3 U.30 | length 17.2
  Top Layer w0.5: U.30 84.55,111.7 85.75,110.5 v1(88,110.5)
  Bottom Layer w0.5: v1(88,110.5) 95.25,110.5 96,109.75 97.5,109.75 P5.3@97.75,110
SCK: R2.2 U.17 | length 25.8
  Top Layer w0.5: U.17 90.071,107.721 91.529,107.721 v1(92.25,107)
  Bottom Layer w0.5: R2.2 72.375,112.9 72.7,112.575 72.8,112.575 79.375,106 91.25,106 v1(92.25,107)
Tx: P5.4 U.31 | length 19.3
  Top Layer w0.5: U.31 83.75,111 85.346,109.404 87.846,109.404 v1(88,109.25)
  Bottom Layer w0.5: v1(88,109.25) 94.088,109.25 ; 94.088,109.25 95.878,107.46 P5.4@97.75,107.46
VCC: C3.1 C4.1 C5.2 C22.1 C24.2 D9.2 P2.1 P5.1 P6.1 R1.2 R3.2 R11.2 U.4 U.6 U.18 | length 15.7
  Top Layer w0.5: R1.2 R3.2 ; P5.1 99.1,113.77 99.1,102.7 98.8,103
Vin: J4.A4 J4.A9 J4.B4 J4.B9 P4.1 | length 16.4
  Top Layer w0.2: J4.A4 63.5,107.425 63.75,107.175 J4.B9
  Top Layer w0.3: P4.1 58.99,101.5 59.502,102.012 59.502,103.502 61.073,105.073 63.177,105.073 ; J4.B9 63.75,105.646 63.177,105.073 ; J4.A9 66.5,107.2 66.25,106.95 J4.B4 66.25,105.646 65.677,105.073 63.177,105.073
pads on no net: J4.A2 J4.A3 J4.A5 J4.A6 J4.A7 J4.A8 J4.A10 J4.A11 J4.B2 J4.B3 J4.B5 J4.B6 J4.B7 J4.B8 J4.B10 J4.B11 U.2 U.9 U.10 U.11 U.12 U.19 U.22 U.24 U.25 U.26 U.27 U.28 Y1.2
copper on no net: | length 177.7
  Top Layer w0.254: 30,101 31,100 99,100 100,101 100,119 99,120 31,120 30,119 30,101

## Polygon pours and split planes (outlines as drawn)
GND on Bottom Layer "GND_L02_P051" (solid, pour order 51): 30.1,118.8 31.1,119.8 31.1,119.9 99,119.9 100.1,118.8 100.1,101.1 99,100 31.1,100 30.1,101
no net on Bottom Layer "Bottom Layer-No Net 1" (solid, pour order 47): 27.9,101.3
no net on Bottom Layer "Bottom Layer-No Net" (solid, pour order 32): 32.6,99.4
no net on Bottom Layer "NONET_L02_P033" (solid, pour order 33): 38.6,96.5
VCC on Top Layer "VCC_L01_P049" (solid, remove dead copper, pour order 49): 30,119 31,120 99,120 100,119 100,101 99,100 31,100 30,101
no net on Top Layer "Top Layer-No Net 1" (solid, pour order 39): 60.2,94.9
no net on Top Layer "Top Layer-No Net" (solid, pour order 30): 49.9,105

## Other copper
Top Layer:
  pour cut-out: 70.7,109.725 70.7,104.142 67.817,104.142 66.312,105.646 66.312,106.437 69.137,109.262 70.7,109.262
  pour cut-out: 59.625,109.3 60.725,109.3 63.7,106.35 63.7,105.225 62.763,104.288 60.288,104.288 59.625,104.775 59.625,105.725 59.625,108.2
  pour cut-out: 61.625,103.502 61.625,100.825 61.25,100.45 59.625,100.45 59.625,100.9 59.625,103.502
  pour cut-out: 68.2,103.5 68.2,101 68.8,100.5 69.8,100.5 69.975,100.5 70.7,100.5 70.7,100.909 70.7,103.5

## Silkscreen, mask and mechanical layers (free items; w line width, h text height)
Top Overlay:
  lines w0.254: 78.05,116.6 78.05,119.2 ; 78.95,117.05 77.3,118.7 ; 79,118.9 77.3,117.2 77.3,118.7 ; 77.3,118.7 77.3,118.7
  text "B  G  R  V" at 87.3,115.9 h0.8
  text "-Bat+" at 31.9,115.6 h0.8
  text "-Mdl+" at 39.4,115.6 h0.8
  text "R Tx Rx  G  V" at 96,105.1 h0.8 r90
  text "R Mos Mis G V" at 85.7,103.4 h0.8
Bottom Overlay:
  lines w0.254: 77.1,117 78.8,118.7 78.8,117.2 ; 77.15,118.85 78.8,117.2 ; 78.05,116.7 78.05,119.3 ; 78.8,117.2 78.8,117.2
  text "+Vin-" at 58.3,103 h0.8
  text "Smart_Case/Rev_01 / Davut M. Kilic" at 47.5,102.7 h1